# Altium PCB AnaCompPCB.PcbDoc
Units mm, origin at the board's own origin, x right, y up, seen from the top; angles counter-clockwise.
Board outline 58 x 38 mm, 2 copper layers (Top Layer, Bottom Layer); 39 components, 19 nets, 130 pads, 29 vias.
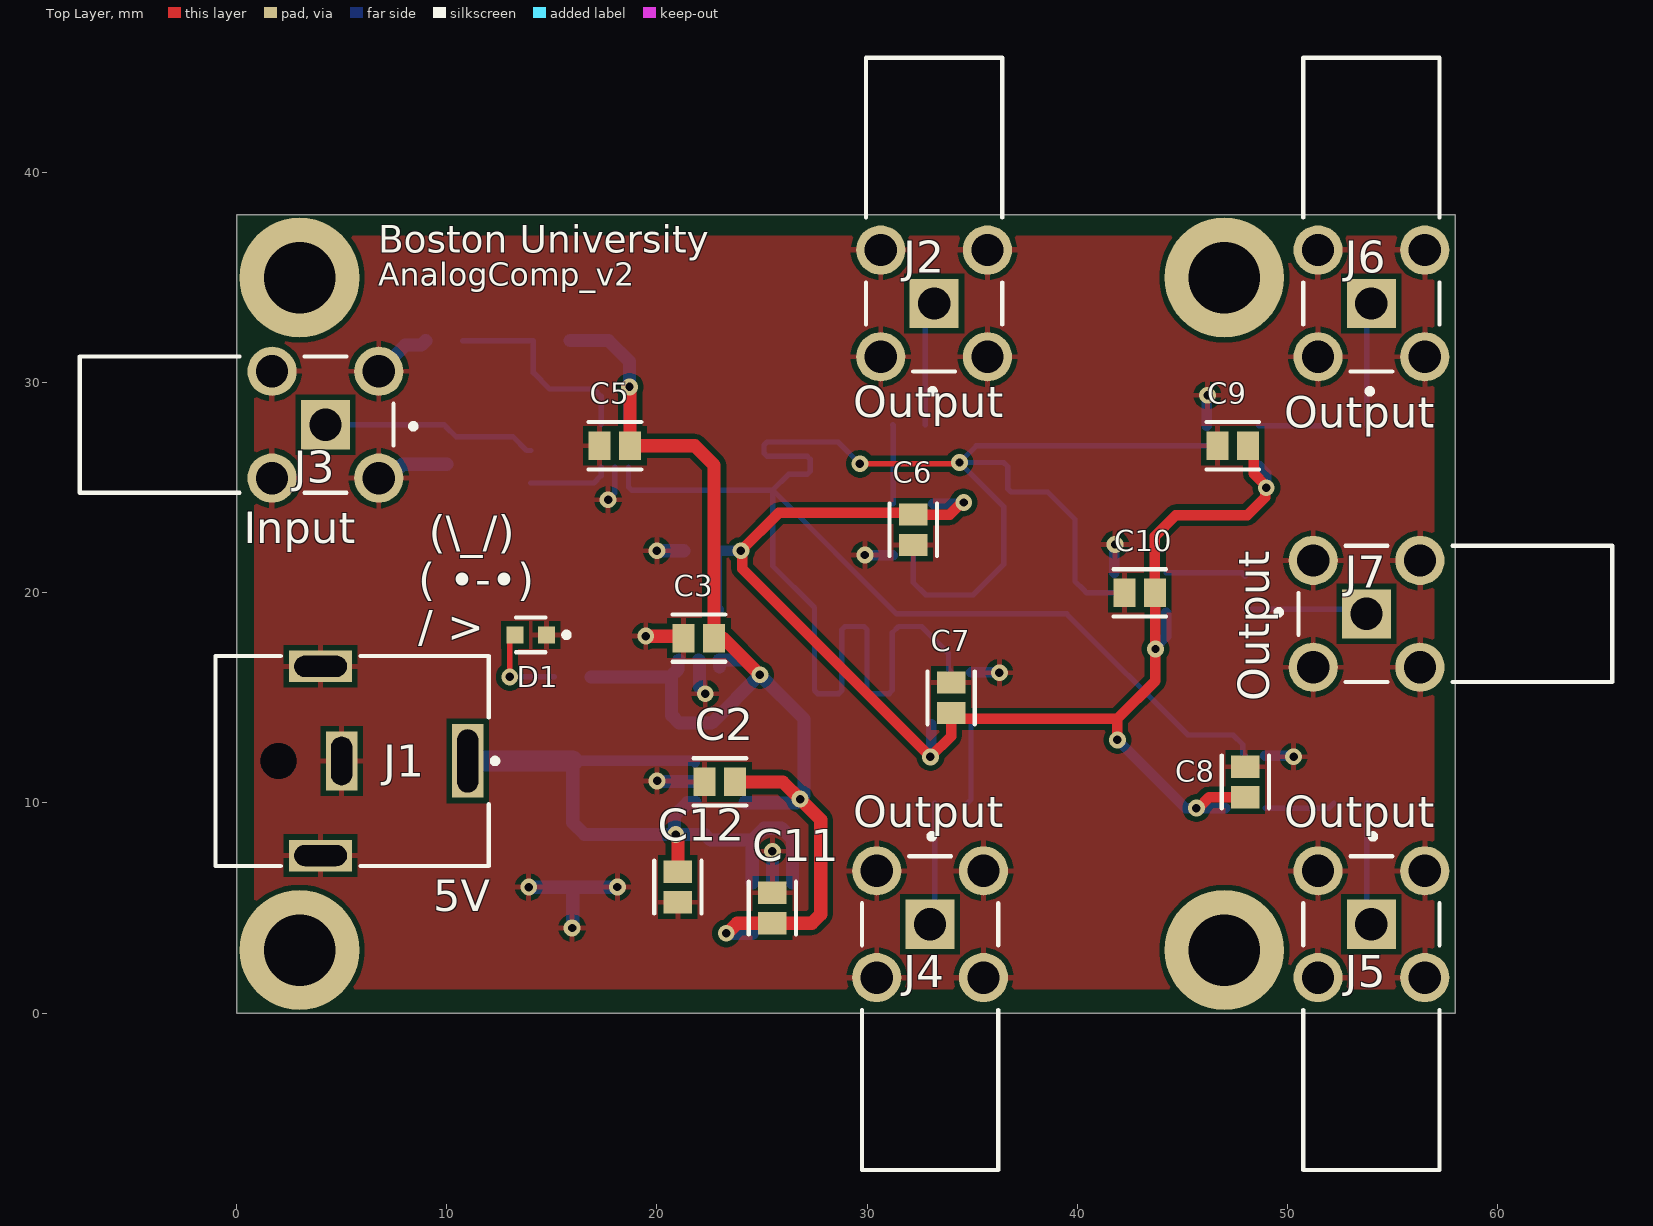
[diagram p0: Top Layer view]
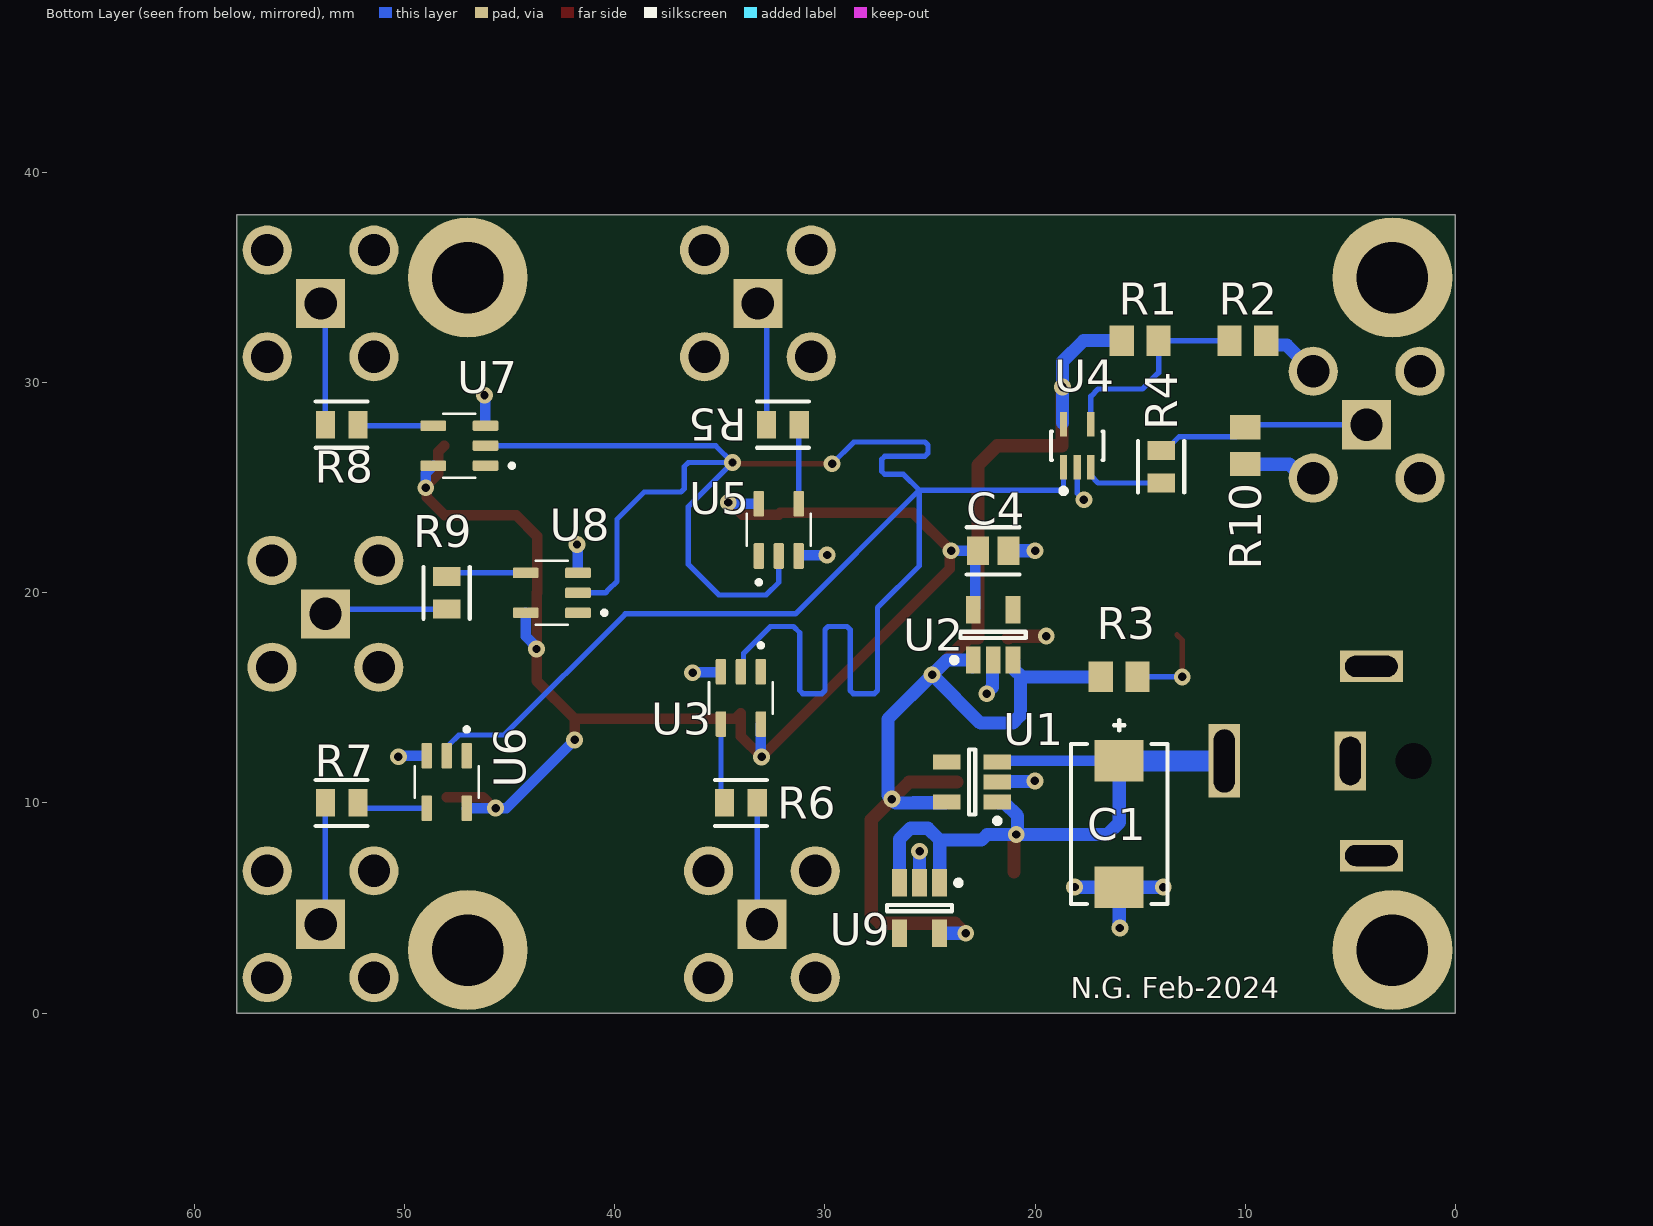
[diagram p1: Bottom Layer view, seen from below]
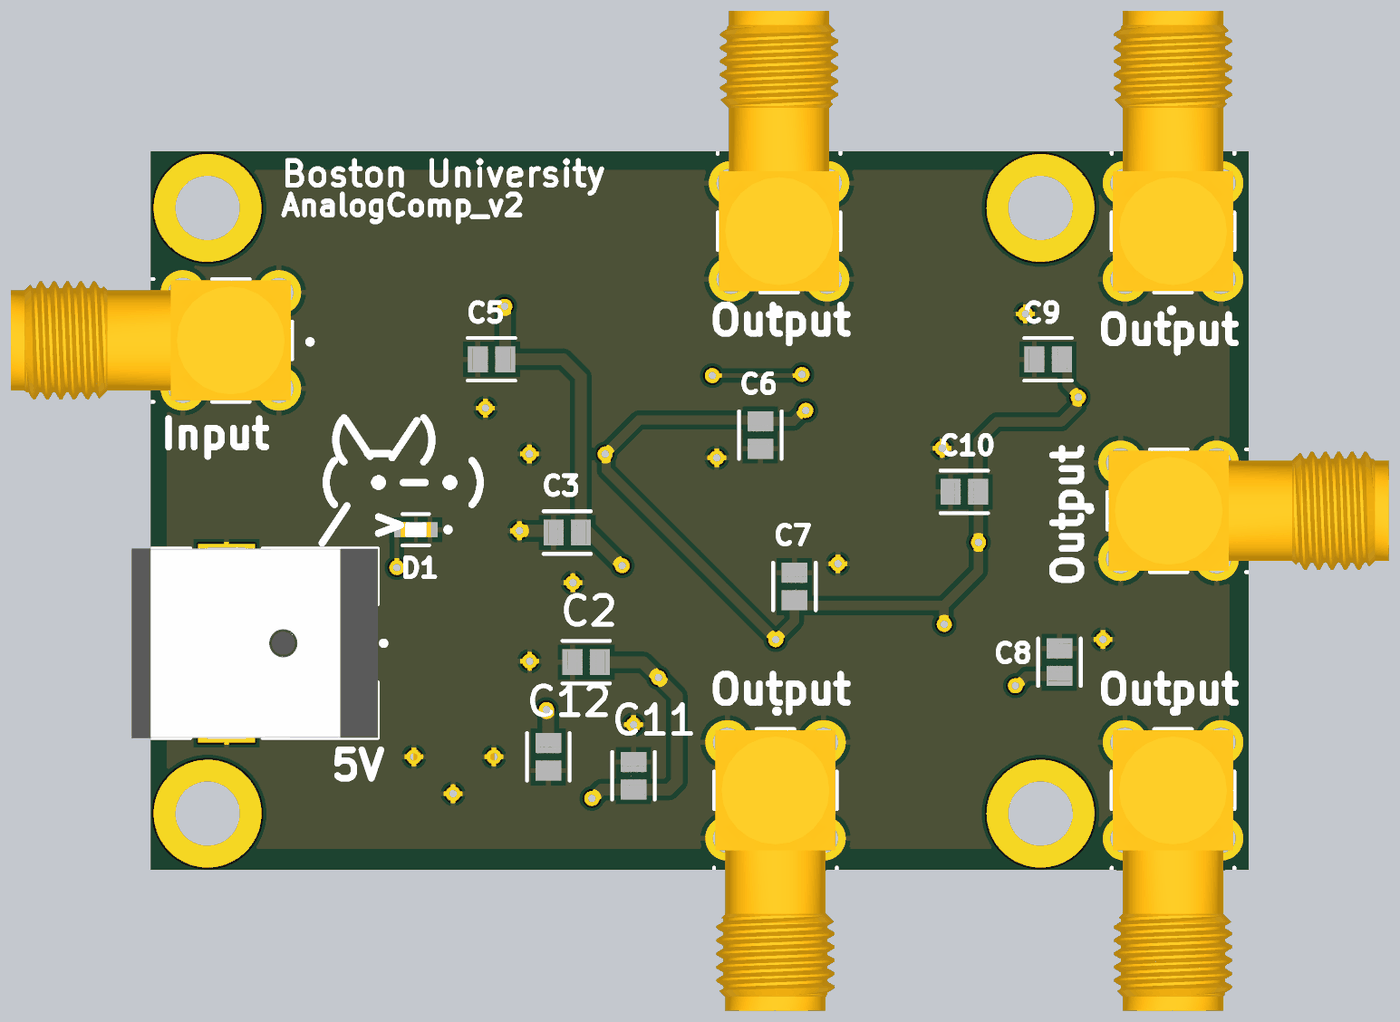
[diagram p2: 3D render of the assembled board from above, using the file's embedded part models]
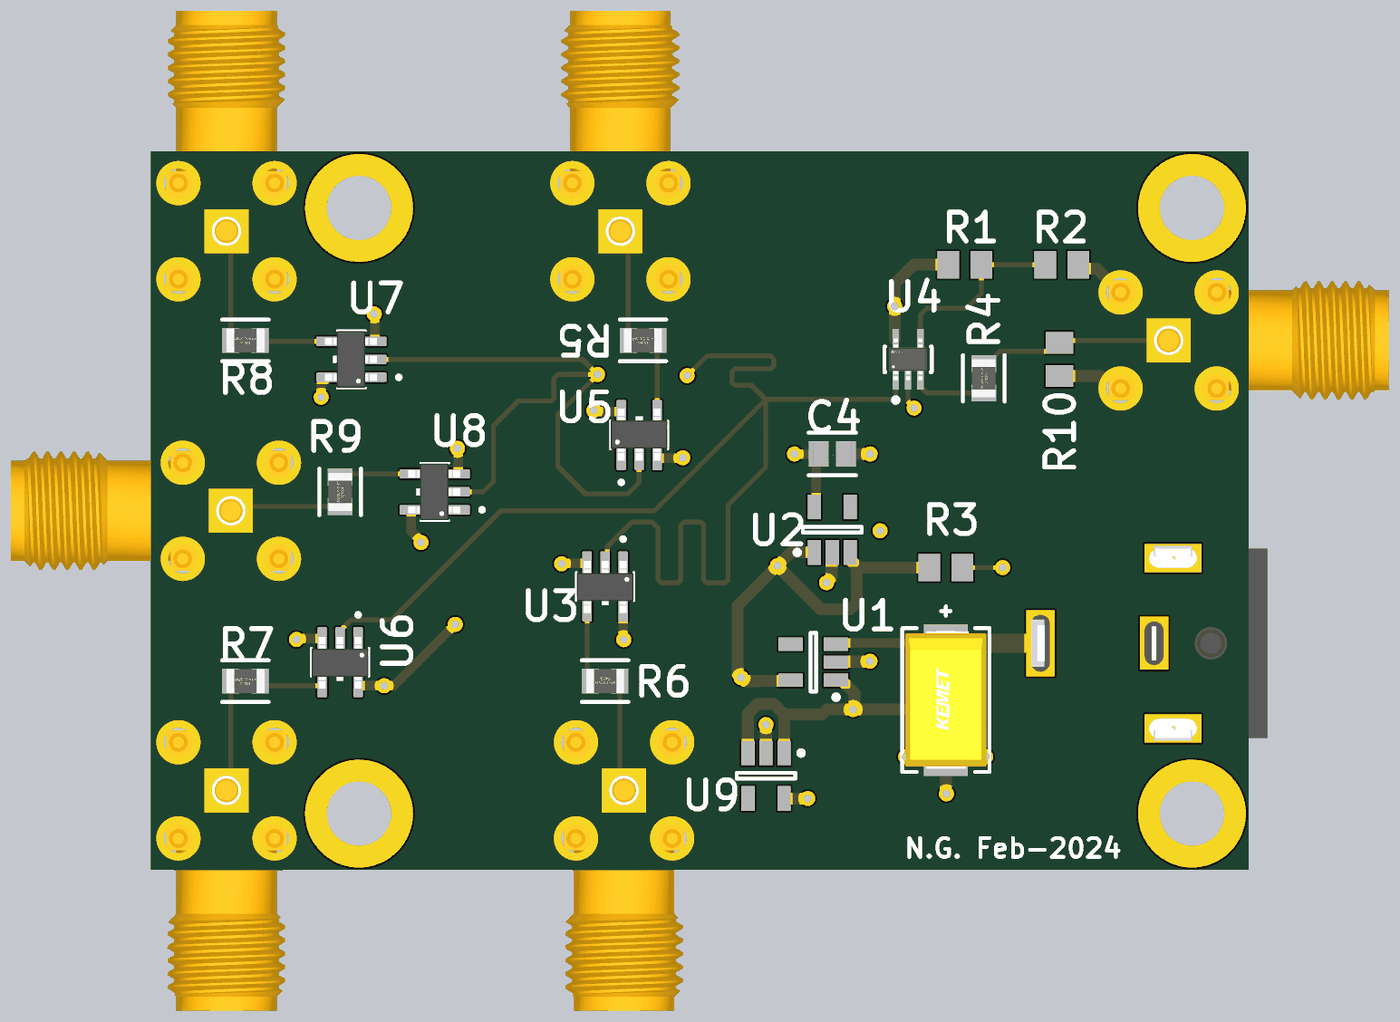
[diagram p3: 3D render of the assembled board from below, using the file's embedded part models]

## Layer stack, top to bottom
Top Solder: solder mask 0.0102, Solder Resist, Dk 3.5
Top Layer: signal copper 0.0356
Dielectric 1: dielectric 0.32, FR-4, Dk 4.8
Bottom Layer: signal copper 0.0356
Bottom Solder: solder mask 0.0102, Solder Resist, Dk 3.5

## Board outline
0,38 58,38 58,0 0,0

## Design rules (kind name [scope] priority, off if disabled: settings)
Clearance [All] p1: gap=0.254 ignorepadtopadclearanceinfootprint=FALSE except(0: Arc-Hole Track-Hole SMDPad-Hole THPad-Hole Via-Hole Fill-Hole Poly-Hole Region-Hole Text-Hole; 0.25: Arc-Arc Arc-Track Arc-SMDPad Arc-THPad Arc-Via Arc-Fill Arc-Poly Arc-Region Track-Track Track-SMDPad Track-THPad Track-Via Track-Fill Track-Poly Track-Region SMDPad-SMDPad SMDPad-THPad SMDPad-Via)
HoleSize [All] p1: absolutevalues=TRUE maxlimit=5 minlimit=0.025 maxpercent=80.000 minpercent=20.000
PolygonConnect [All] p1: connectstyle=Relief reliefconductorwidth=0.254 reliefentries=4 polygonreliefangle="90 Angle" airgapwidth=0.254
RoutingVias [All] p1: holewidth=0.4 width=0.8 viastyle="Through Hole" minholewidth=0.4 minwidth=0.8 maxholewidth=0.4 maxwidth=0.8
SolderMaskExpansion [All] p1: expansion=0.102 istentingtop=FALSE
UnRoutedNet [All] p1: checkbadconnections=TRUE
Width [All] p1: maxlimit=1.7 minlimit=0.254 preferedwidth=0.254
28 further rules are at their usual default settings.

## Components (designator, comment, footprint, x,y, rotation, side; value= is the part's Value field where it differs from the comment)
C1 "47uF" FP-T491X476K035AT-MFG 16,9 r90 bottom
C2 "0.1uF" FP-CL21-IPC_C 23,11 r180 top
C3 "0.1uF" FP-CL21-IPC_C 22,17.85 r180 top
C4 "0.1uF" FP-CL21-IPC_C 22,22 r180 bottom
C5 "0.1uF" FP-CL21-IPC_C 18,27 r0 top
C6 "0.1uF" FP-CL21-IPC_C 32.2,23 r270 top
C7 "0.1uF" FP-CL21-IPC_C 34,15 r90 top
C8 "0.1uF" FP-CL21-IPC_C 48,11 r90 top
C9 "0.1uF" FP-CL21-IPC_C 47.4,27 r180 top
C10 "0.1uF" FP-CL21-IPC_C 42.976,20 r180 top
C11 "0.1uF" FP-CL21-IPC_C 25.5,5 r90 top
C12 "0.1uF" FP-CL21-IPC_C 21,6 r270 top
D1 "LTST-C193KRKT-5A" FP-LTST-C193KRKT-5A-MFG 14,18 r180 top
J1 "PJ-063AH" CUI-PJ-063AH_V 5,12 r180 top
J2 "73391-0083" FP-73391-0083-MFG 33.191,38 r270 top
J3 "73391-0083" FP-73391-0083-MFG 0,28 r0 top
J4 "73391-0083" FP-73391-0083-MFG 33,0 r90 top
J5 "73391-0083" FP-73391-0083-MFG 54,0 r90 top
J6 "73391-0083" FP-73391-0083-MFG 54,38 r270 top
J7 "73391-0083" FP-73391-0083-MFG 58,19 r180 top
R1 "87K ohm" RESC2013X50X40NL20T20 15,32 r0 bottom
R2 "12K ohm" RESC2013X50X40NL20T20 9.875,32 r0 bottom
R3 "1K ohm" RESC2013X50X40NL20T20 16,16 r0 bottom
R4 "33 ohm" FP-CRGCQ0805-IPC_C 14,26 r270 bottom value=33Ω
R5 "33 ohm" FP-CRGCQ0805-IPC_C 32,28 r0 bottom value=33Ω
R6 "33 ohm" FP-CRGCQ0805-IPC_C 34,10 r180 bottom value=33Ω
R7 "33 ohm" FP-CRGCQ0805-IPC_C 53,10 r0 bottom value=33Ω
R8 "33 ohm" FP-CRGCQ0805-IPC_C 53,28 r0 bottom value=33Ω
R9 "33 ohm" FP-CRGCQ0805-IPC_C 48,20 r270 bottom value=33Ω
R10 "100 ohm" RESC2013X50X40NL20T20 10,27 r90 bottom
U1 "MCP1801T-3302I/OT" SOT-23-OT5_M 23,11 r0 bottom
U2 "MCP1801T-1802I/OT" SOT-23-OT5_M 22,18 r90 bottom
U3 "74LV1T34GV-Q100H" SOT95P275X110-5N 34,15 r270 bottom
U4 "MAX49140AXK/V+" FP-X5-1C-MFG 18,27 r90 bottom
U5 "74LV1T34GV-Q100H" SOT95P275X110-5N 32.2,23 r90 bottom
U6 "74LV1T34GV-Q100H" SOT95P275X110-5N 48,11 r270 bottom
U7 "74LV1T34GV-Q100H" SOT95P275X110-5N 47.4,27 r0 bottom
U8 "74LV1T34GV-Q100H" SOT95P275X110-5N 43,20 r0 bottom
U9 "MCP1801T-3302I/OT" SOT-23-OT5_M 25.5,5 r270 bottom

## Footprints (in the part's own frame and the unit in brackets; to place one, negate y for a bottom-side part, rotate by r counter-clockwise, add the part's x,y. Pads: shape width x height; smd on the part's side, far side on the other; paste and mask are expansions set on the pad)
CUI-PJ-063AH_V [mm] "THD, 2-Leads, Body 13x10mm, Height 9mm"
  rect 1.5x3.5 hole 1 slot 3 at 90 deg: 1(-6,0)
  rect 1.5x2.8 hole 1 slot 2.3 at 90 deg: 2(0,0)
  rect 3x1.5 hole 1 slot 2.5 at 0 deg: 3(1,4.5) 4(1,-4.5)
  round 1.4 hole 1.7 unplated: 5(3,0)
  silkscreen extent -7.42,-5 6,5, body extent -7,-5.15 6,5.15, height 9
FP-73391-0083-MFG [mm]
  rect 2.34x2.34 hole 1.54 paste-2539.97 mask+0: 1(4.23,0)
  round 2.34 hole 1.54 paste-2539.97 mask+0: 2(1.69,2.54) 3(6.77,2.54) 4(1.69,-2.54) 5(6.77,-2.54)
  silkscreen extent -7.46,-3.24 8.53,3.24, body extent -7.56,-3.81 8.04,3.81, height 0.25
FP-CL21-IPC_C [mm]
  rect 1.055x1.356 smd paste+0 mask+0: 1(-0.726,0) 2(0.726,0)
  silkscreen extent -1.25,-1.12 1.25,1.12, body extent -1.35,-0.82 1.35,0.82, height 0.25
FP-CRGCQ0805-IPC_C [mm]
  rect 0.906x1.31 smd paste+0 mask+0: 1(-0.776,0) 2(0.776,0)
  silkscreen extent -1.23,-1.1 1.23,1.1, body extent -1,-0.63 1,0.63, height 0.65
FP-LTST-C193KRKT-5A-MFG [mm]
  rect 0.8x0.8 smd paste+0 mask+0: 1(-0.75,0) 2(0.75,0)
  silkscreen extent -1.83,-0.82 0.7,0.82, body extent -1.25,-0.55 1.25,0.55, height 0.25
FP-T491X476K035AT-MFG [mm]
  rect 1.99x2.33 smd paste+0 mask+0: 1(-3.01,0) 2(3.01,0)
  silkscreen extent -3.8,-2.3 4.95,2.3, body extent -3.65,-2.15 3.65,2.15, height 4.3
FP-X5-1C-MFG [mm]
  rect 1.15x0.35 smd paste+0 mask+0: 1(-1.025,0.65) 2(-1.025,0) 3(-1.025,-0.65) 4(1.025,-0.65) 5(1.025,0.65)
  silkscreen extent -2.27,-1.25 0.67,1.25, body extent -1.1,-1 1.1,1, height 1.1
RESC2013X50X40NL20T20 [mm] "Chip Resistor, 2-Leads, Body 2.00x1.25mm, IPC Medium Density"
  rect 1.15x1.45 smd: 1(-0.875,0) 2(0.875,0)
  body extent -1.1,-0.72 1.1,0.72, height 0.5
SOT95P275X110-5N [mm]
  rrect25% 1.22x0.5 smd: 1(-1.245,0.95) 2(-1.245,0) 3(-1.245,-0.95) 4(1.245,-0.95) 5(1.245,0.95)
  silkscreen extent -2.6,-1.52 0.75,1.52, body extent -1.34,-1.5 1.41,1.5, height 1.1
SOT-23-OT5_M [mm] "SOT23, 5-Leads, Body 2.9x1.7mm, Pitch 0.95mm, Lead Span 2.8mm, IPC Low Density"
  rect 1.3x0.7 smd: 1(-1.2,0.95) 2(-1.2,0) 3(-1.2,-0.95) 4(1.2,-0.95) 5(1.2,0.95)
  silkscreen extent -1.32,-1.55 0.15,1.97, body extent -0.9,-1.55 0.9,1.55, height 1.45

## Part data
C1: library part CMP-03017-000044-1, "CAP TANT 47UF 10% 35V 2917 Part: T491X476K035AT", Case Code (Imperial)=2917, Case Code (Metric)=7343, Dielectric Material=Tantalum, ESR (Equivalent Series Resistance)=600mR, Leakage Current=16.5uA, Max Operating Temperature=125°C, Min Operating Temperature=-55°C, Package Quantity=1, Ripple Current=524mA, Tolerance=10%, Voltage=35V, Capacitance=47uF, Case/Package=2917, Construction=Flat, Depth=4.3mm, Dissipation Factor=8%, Features="General Purpose", Height=4mm, Height - Seated (Max)=0.169inch, Lead Free="Lead Free", Length=7.3mm, Life (Hours)=2000Hour, Mount="Surface Mount", Number of Pins=2, Packaging="Tape and Reel", Polarity=Polar, Radiation Hardening=No, REACH SVHC="No SVHC", RoHS Compliant=Yes, Series=T491, Termination=SMD/SMT, Voltage Rating=35V, Voltage Rating (DC)=35V, Width=4.3mm
C2 C3 C4 C5 C6 C7 C8 C9 C10 C11 C12: library part CMP-13271-002854-1, "CL21 Series 0805 100nF 25V ±10% Tolerance X7R Multilayer Ceramic Chip Capacitor", Capacitance=100nF, Case Code (Imperial)=0805, Case Code (Metric)=2012, Dielectric=X7R, Max Operating Temperature=125°C, Min Operating Temperature=-55°C, Package Quantity=1, Tolerance=10%, Voltage=25V, Case/Package=0805, Contact Plating=Tin, Depth=1.25mm, Height=0.85mm, Length=2mm, Mount="Surface Mount", Packaging="Tape and Reel", Radiation Hardening=No, Thickness=0.037inch, Voltage Rating=25V, Width=0.049inch
D1: library part CMP-2000-06623-2, "LED RED CLEAR CHIP SMD", Case Code (Imperial)=0603, Case Code (Metric)=1608, Color=Red, Forward Current=5mA, Forward Voltage=2.3V, Lens Color=Colorless, Max Operating Temperature=85°C, Min Operating Temperature=-55°C, Package Quantity=3000, Power Dissipation=50mW, Reverse Voltage=5V, Case/Package=0603, Depth=0.8mm, Dominant Wavelength=631nm, Height=0.35mm, Illumination Color=Red, Lead Free="Lead Free", Length=1.6mm, Lens Style=Diffused, Lens Transparency=Clear, Luminous Intensity=45mcd, Mount="Surface Mount", Number of Elements=1, Number of LEDs=1, Number of Pins=2, Packaging="Tape and Reel", Radiation Hardening=No, Test Current=5mA, Viewing Angle=130°, Width=0.8mm
J1: library part CMP-2000-06898-1, "Through Hole Right Angle DC Power Jack, 8 A, 2 mm Center Pin, 2 Position, -25 to 85 degC, RoHS, Bulk", Current Rating=8A, Flammability Rating=UL94V-0, Insulation Resistance=100MOhms, Manufacturer=CUIInc., Operating Temperature Range=-25Cto+85C, Package Description="2-Pin Through Hole Device, Body 13 x 10 mm, Height 9 mm", Voltage Rating=24V, Brand=CUI, Connector Type=DCPowerJack, Contact Gender=Male, Contact Material=Copper, Contact Plating=Nickel, Datasheet URL=http://www.cui.com/product/resource/pj-063ah.pdf, Datasheet Version="Rev. 1.02, 03/2016", Factory Pack Quantity=500, Housing Material=PolybutyleneTerephthalate(PBT), Inside Contact Diameter=2mm, Manufacturer URL=http://www.cui.com/, Mounting Angle=Right, Mounting Style=KinkedPin, Mounting Technology=ThroughHole, Outside Contact Diameter=6.5mm, Package Reference=PJ-063AH, Product=Jacks, Product Category=DCPowerConnectors, RoHS=True, Termination Style=ThroughHole
J2 J3 J4 J5 J6 J7: library part CMP-04764-000017-1, "SMA RA JACK, PCB", Case/Package=SMA, Body Plating=Gold, Connector Type=SMA, Contact Material=Copper, Contact Plating=Gold, Gender=Female, Impedance=50R, Mount=PCB, Orientation="Right Angle", REACH SVHC="No SVHC", RoHS Compliant=Yes, Termination=Solder
R1 R2 R3 R10: library part CMP-2001-04812-1, Manufacturer=Susumu, Part Number=RG2012N-123-W-T1
R4 R5 R6 R7 R8 R9: library part CMP-03211-008574-1, "CRGCQ0805 33Ω 0.125W ±200ppm/°C 1% 150V", Ambient Temperature Range High=+70°C, Manufacturer="TE Connectivity", Manufacturer Part Number=CRGCQ0805F33R, Package=CRGCQ0805, Power Rating=0.125W, Resistance=33Ω, Temperature="-55°C to +155°C", Temperature Coefficient=±200ppm/°C, Temperature Range High=+155°C, Temperature Range Low=-55°C, Tolerance=0.01, Voltage Rating=150V, Automotive=Yes, Automotive Grade="Grade 343", Category=Res, ComponentLink2Description=Datasheet, ComponentLink2URL=https://www.te.com/commerce/DocumentDelivery/DDEController?Action=showdoc&DocId=Data+Sheet%7F1773204-3%7F1%7Fpdf%7FEnglish%7FENG_DS_1773204-3_1.pdf%7F4-2176341-352, Composition="Thick Film", Device Class L1="Passive Components", Device Class L2=Resistors, Device Class L3="Chip SMD Resistors", Height=0.65mm, Ipc Land Pattern Name=RESC200125X55, Lead Free=Yes, Octopart=https://octopart.com/crgcq0805f33r-te+connectivity-91018172, RoHS=TRUE, Series=CRGCQ
U1 U9: library part CMP-0136-00719-1, "150 mA, High PSRR, Low Quiescent Current LDO, 5-Pin SOT-23, Industrial Temperature, Tape and Reel", Code_IPC=SOT23-5, DatasheetVersion="revC, Jan-2009", PackageDescription="5-Lead Plastic Small Outline Transistor (OT) [SOT-23]", PackageReference=SOT-23-OT5, PackageVersion="revBB, Aug-2009"
U2: library part CMP-0136-00723-1, "150 mA, High PSRR, Low Quiescent Current LDO, 5-Pin SOT-23, Industrial Temperature, Tape and Reel", Code_IPC=SOT23-5, DatasheetVersion="revC, Jan-2009", PackageDescription="5-Lead Plastic Small Outline Transistor (OT) [SOT-23]", PackageReference=SOT-23-OT5, PackageVersion="revBB, Aug-2009"
U3 U5 U6 U7 U8: "Level Shifter"
U4: library part CMP-05700-000010-1, "30NS, LOW-POWER, 3V/5V, RAIL-TO-"

## Free pads (board coordinates)
  round 5.7 hole 3.4: 1(3,3) 1(3,35) 1(47,3) 1(47,35)

## Via types
v1: diameter 0.8, hole 0.4, Top Layer to Bottom Layer, 29 vias

## Nets (pads, with @x,y where several pads share a name; then routed paths per layer and width w, separated by ;. In a path a pad name is that pad's centre, name@x,y a point inside that pad or via, vN(x,y) a via of type N, cw(c..) or ccw(c..) an arc to the next point about the centre after c; other vN are vias at no path point)
1V8: C4.1 C6.1 C7.1 C8.1 C9.1 C10.1 U2.5 U3.5 U5.5 U6.5 U7.5 U8.5 | length 74.3
  Top Layer w0.5: v1(34.6,24.3) 34.519,24.3 33.945,23.726 C6.1 32.126,23.8 25.8,23.8 v1(24,22) 24.057,21.943 24.057,21.149 v1(33.014,12.193) 34,13.179 C7.1 34.274,14 41.9,14 ; v1(41.915,12.999) 41.9,13.015 41.9,14 ; C10.1 43.702,22.702 44.7,23.7 48.1,23.7 48.943,24.543 48.943,24.943 v1(49,25) 49,25.081 48.403,25.678 48.403,26.723 C9.1 ; C10.1@43.726,20 v1(43.726,17.326) 43.726,15.826 41.9,14 ; v1(45.674,9.755) 45.755,9.755 46.274,10.274 C8.1
  Bottom Layer w0.5: U2.5 22.85,19.3 22.85,21.876 C4.1 v1(24,22) ; v1(33.014,12.193) 33.05,12.229 U3.5 ; U5.5 34.545,24.245 v1(34.6,24.3) ; v1(41.915,12.999) 45.16,9.755 v1(45.674,9.755) U6.5 ; v1(43.726,17.326) 43.726,17.407 44.245,17.926 U8.5 ; U7.5 49,25.695 v1(49,25)
3V3: C2.1 C3.1 C5.2 C11.1 R1.2 R3.2 U1.5 U2.1 U2.3 U4.5 U9.5 | length 64
  Top Layer w0.625: v1(18.7,29.8) 18.726,29.774 C5.2 21.8,27 22.726,26.074 C3.1 23.15,17.85 v1(24.902,16.098) ; v1(23.3,3.8) 23.347,3.8 23.822,4.274 C11.1 27.374,4.274 27.8,4.7 27.8,9.2 v1(26.817,10.183) 26,11 C2.1
  Bottom Layer w0.625: R1.2 17.7,32 18.7,31 v1(18.7,29.8) U4.5@18.7,28.075 ; R3.2 20.646,16 21.013,16.366 21.013,16.762 U2.3 ; 20.7,16 20.7,14.166 21.066,13.8 22.604,13.8 v1(24.902,16.098) ; U2.1@22.988,16.462 22.988,16.762 U2.1 24.2,16.8 v1(24.902,16.098) ; v1(23.3,3.8) U9.5 ; U1.5 24.238,10.012 25.787,10.012 25.8,10 26.634,10 v1(26.817,10.183) 27,10.366 27,14 v1(24.902,16.098)
comp_out: U3.2 U4.1 U5.2 U6.2 U7.2 U8.2 | length 114.8
  Top Layer w0.254: v1(29.664,26.141) 34.341,26.141 v1(34.4,26.2)
  Bottom Layer w0.254: U4.1 18.65,25.034 18.799,24.885 25.515,24.885 ; v1(29.664,26.141) 28.625,27.18 25.249,27.18 25.1,27.031 25.1,26.649 25.249,26.5 27.151,26.5 27.3,26.351 27.3,25.784 27.151,25.635 26.265,25.635 25.515,24.885 ; U5.2 32.2,20.5 32.8,19.9 35.051,19.9 36.5,21.349 36.5,24.1 v1(34.4,26.2) ; U3.2 33.877,16.368 33.877,17.123 32.6,18.4 31.5,18.4 31.2,18.1 31.2,15.349 31.051,15.2 30.149,15.2 30,15.349 30,18.251 29.851,18.4 28.949,18.4 28.8,18.251 28.8,15.349 28.651,15.2 27.649,15.2 27.5,15.349 27.5,19.3 25.515,21.285 25.515,24.885 ; U8.2 40.449,20 40.3,20.149 39.9,20.549 39.9,23.5 38.6,24.8 36.849,24.8 36.7,24.949 36.7,26 36.5,26.2 v1(34.4,26.2) ; U7.2 35.2,27 v1(34.4,26.2) ; U6.2 47.877,12.368 47.877,12.775 47.42,13.232 45.268,13.232 39.5,19 31.4,19 25.515,24.885
GND: C1.1 C2.2 C3.2 C4.2 C5.1 C6.2 C7.2 C8.2 C9.2 C10.2 C11.2 C12.2 D1.1 J1.2 J1.3 J1.4 J2.2 J2.3 J2.4 J2.5 J3.2 J3.3 J3.4 J3.5 J4.2 J4.3 J4.4 J4.5 J5.2 J5.3 J5.4 J5.5 J6.2 J6.3 J6.4 J6.5 J7.2 J7.3 J7.4 J7.5 R2.1 R10.1 U1.2 U2.2 U3.3 U4.2 U5.3 U6.3 U7.3 U8.3 U9.2 | length 29.3
  Top Layer w0.635: v1(19.473,17.941) 21.184,17.941 C3.2 ; v1(20.011,11.05) 20.011,11.053 v1@20.064,11
  Bottom Layer w0.254: v1(17.68,24.425) 18,24.745 U4.2
  Bottom Layer w0.5: v1@29.923,21.778 U5.3@31.227,21.778 ; U3.3@34.95,16.222 v1@36.278,16.222 ; U8.3 v1@41.755,22.21 ; U7.3 v1@46.155,29.355 ; U6.3 v1@50.255,12.245
  Bottom Layer w0.635: J3.5 7.231,25.46 7.896,26.125 R10.1 ; J3.3 8.019,31.789 8.789,31.789 R2.1 ; v1(13.9,6) 13.91,5.99 C1.1 ; v1(15.969,4.049) 16,4.08 C1.1 ; v1(18.122,6.002) 18.11,5.99 C1.1 ; v1(20,22) C4.2 ; v1(20.011,11.05) 20.036,11.025 21.775,11.025 U1.2 ; U2.2 22.032,16.768 22.032,15.512 22.3,15.245 v1(22.3,15.2) ; U9.2 v1@25.5,7.7 ; v1(29.9,21.8) v1@29.923,21.778 ; v1@36.278,16.222 v1(36.3,16.2) ; v1@41.755,22.21 41.8,22.255 v1(41.8,22.3) ; v1@46.155,29.355 v1(46.2,29.4) ; v1@50.255,12.245 v1(50.3,12.2)
  other v1: 25.5,7.7
in: J3.1 R4.1 R10.2 | length 10.3
  Bottom Layer w0.254: J3.1 9.875,28 R10.2 10.448,27.427 13.147,27.427 13.798,26.776 R4.1
in_term: R4.2 U4.3 | length 3.9
  Bottom Layer w0.254: R4.2 16.999,25.224 17.35,25.575 U4.3
led_k: D1.2 R3.1 | length 4.2
  Top Layer w0.254: v1(13,16) 13,17.75 D1.2
  Bottom Layer w0.254: v1(13,16) R3.1
out1: R5.1 U5.4 | length 3.8
  Bottom Layer w0.254: R5.1 31.25,27.974 U5.4
out2: R6.1 U3.4 | length 3.8
  Bottom Layer w0.254: R6.1 34.95,10.174 U3.4
out3: R8.1 U7.4 | length 3.6
  Bottom Layer w0.254: U7.4 52.174,27.95 R8.1
out4: R7.1 U6.4 | length 3.4
  Bottom Layer w0.254: U6.4 51.979,9.755 R7.1
out5: R9.1 U8.4 | length 3.8
  Bottom Layer w0.254: U8.4 47.826,20.95 R9.1
out_term1: J2.1 R5.2 | length 5.9
  Bottom Layer w0.254: R5.2 32.776,33.355 J2.1
out_term2: J4.1 R6.2 | length 5.9
  Bottom Layer w0.254: J4.1 33.224,4.454 R6.2
out_term3: J6.1 R8.2 | length 5.9
  Bottom Layer w0.254: R8.2 53.776,33.546 J6.1
out_term4: J5.1 R7.2 | length 5.9
  Bottom Layer w0.254: R7.2 53.776,4.454 J5.1
out_term5: J7.1 R9.2 | length 5.9
  Bottom Layer w0.254: R9.2 53.546,19.224 J7.1
vin: C1.2 C12.1 J1.1 U1.1 U1.3 U9.1 U9.3 | length 33.1
  Top Layer w0.625: v1(20.9,8.5) 20.9,8.453 21,8.353 C12.1
  Bottom Layer w0.5: C1.2 21.74,12.01 U1.3
  Bottom Layer w0.625: C1.2@15.99,12 C1.2 16,9.066 16.566,8.5 v1(20.9,8.5) ; U1.1 21.762,10.012 21.462,10.012 20.833,9.383 20.833,8.614 20.9,8.547 v1(20.9,8.5) ; U9.1 24.537,6.212 24.537,8.237 ; U9.3 26.462,6.213 26.462,8.271 25.934,8.8 25.1,8.8 24.537,8.237 ; v1(20.9,8.5) 22.288,8.5 22.55,8.237 24.537,8.237
  Bottom Layer w1: J1.1 C1.2@15.99,12
vth: R1.1 R2.2 U4.4 | length 9.9
  Bottom Layer w0.254: R2.2 R1.1 14.125,30.475 14.9,29.7 17,29.7 17.35,29.35 U4.4
pads on no net: J1.5 U1.4 U2.4 U3.1 U5.1 U6.1 U7.1 U8.1 U9.4

## Polygon pours and split planes (outlines as drawn)
GND on Top Layer "GND_L01_P000" (solid, pour order 0): 0.849,37 57,37 57,1 56.869,1.131 0.849,1.131

## Silkscreen, mask and mechanical layers (free items; w line width, h text height)
Top Overlay:
  text "Boston University" at 6.754,36.187 h1.3
  text "AnalogComp_v2" at 6.754,34.621 h1.1
  text "Output" at 29.35,28.35 h1.5
  text "Output" at 49.85,27.85 h1.5
  text "Input" at 0.35,22.35 h1.5
  text "(\_/)" at 9.146,22.146 h1.52
  text "( •-•)" at 8.646,19.892 h1.52
  text "/ >" at 8.646,17.642 h1.52
  text "Output" at 49.15,14.85 h1.5 r90
  text "Output" at 29.35,8.85 h1.5
  text "Output" at 49.85,8.85 h1.5
  text "5V" at 9.35,4.85 h1.5
Bottom Overlay:
  text "N.G. Feb-2024" at 18.3,0.7 h1